# Altium PCB PCB1.PcbDoc
Units mm, origin at the board's own origin, x right, y up, seen from the top; angles counter-clockwise.
Board outline 48.77 x 52.07 mm, 2 copper layers (Top Layer, Bottom Layer); 24 components, 15 nets, 112 pads, 26 vias.
Unrouted connection lines stored in the file: 1.
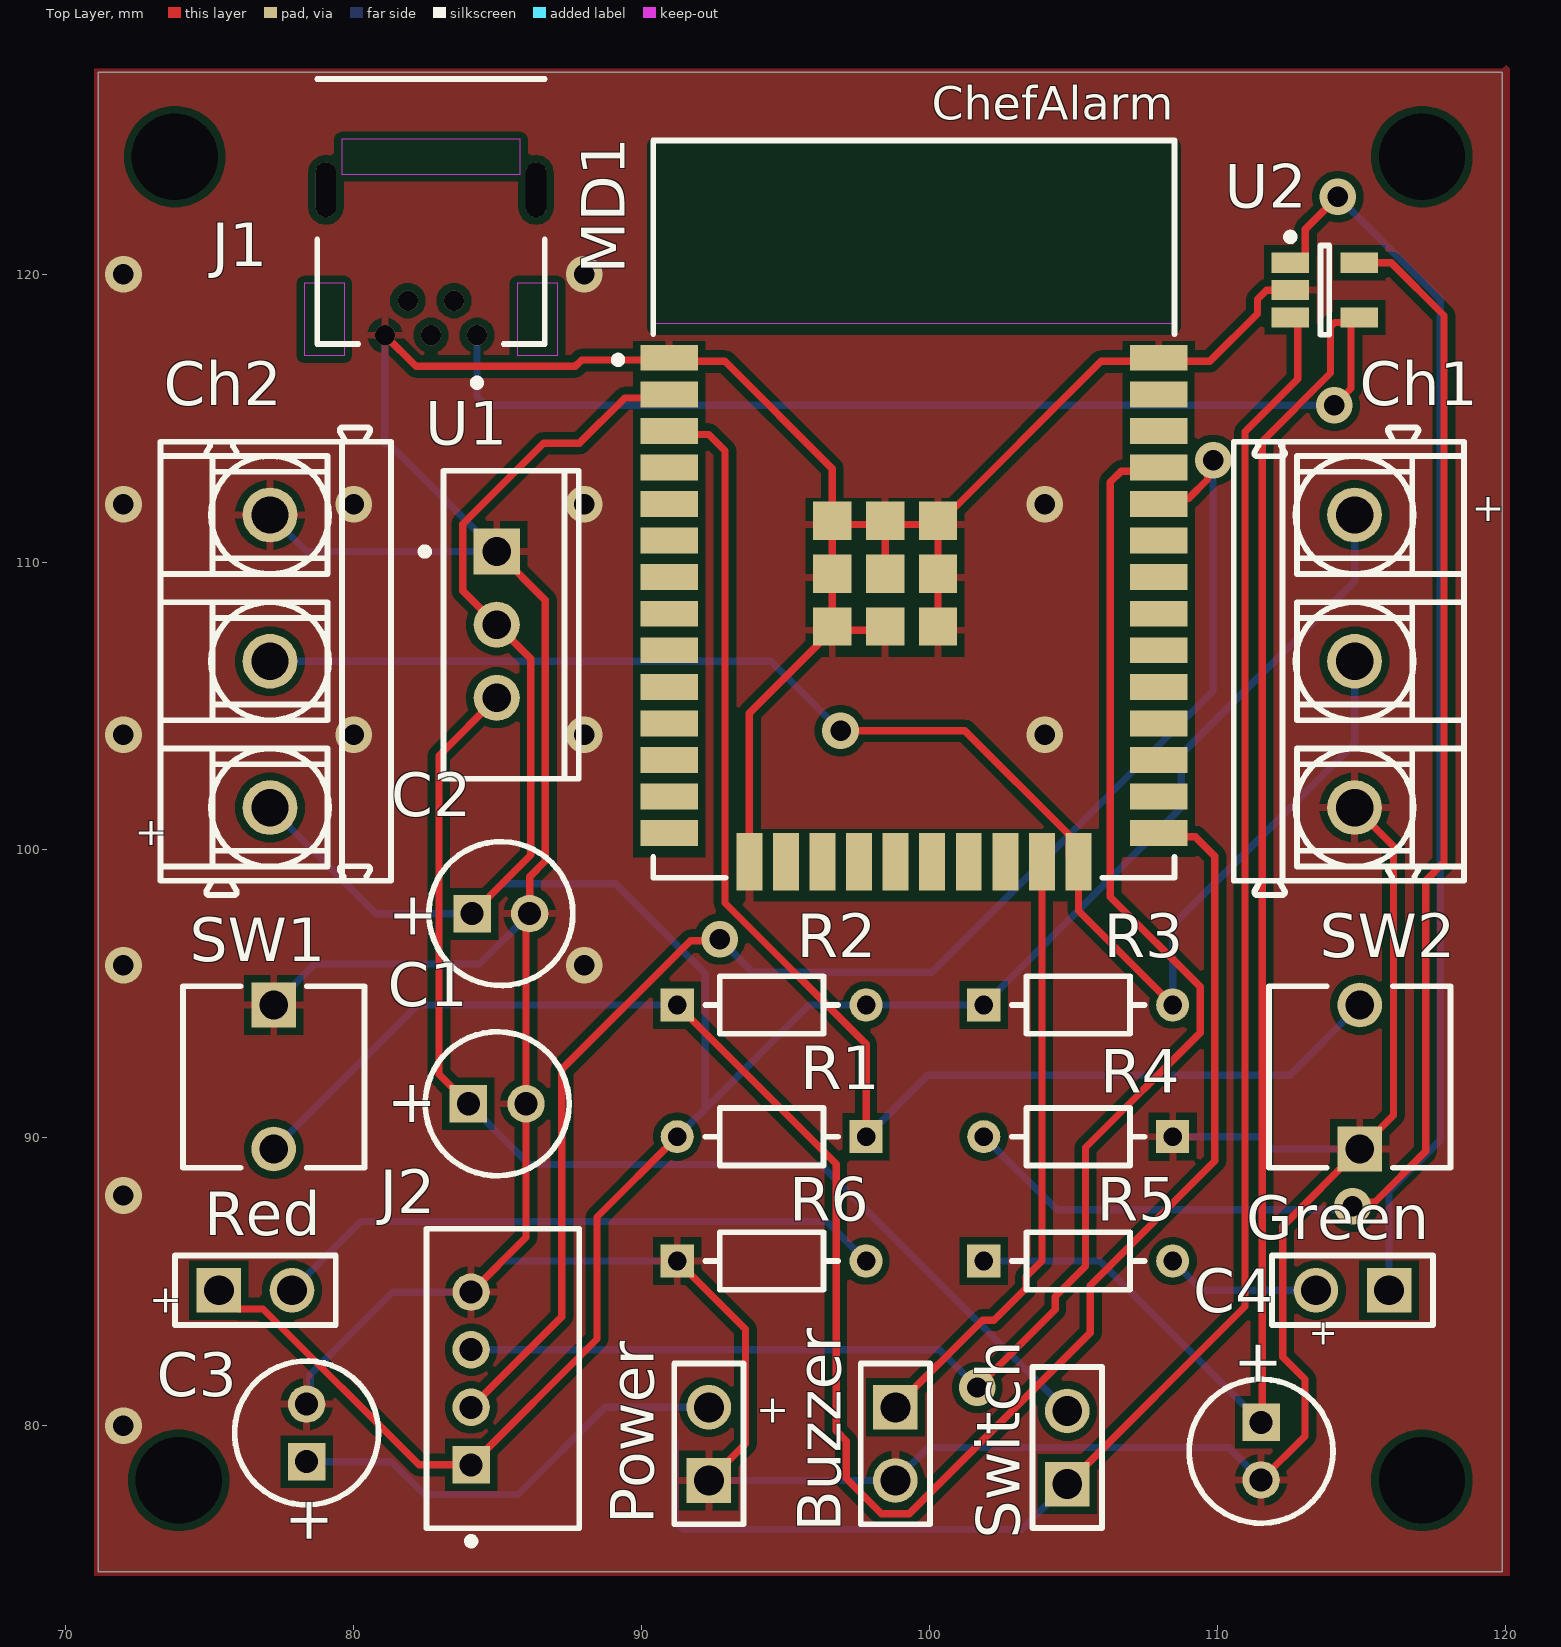
[diagram p0: Top Layer view]
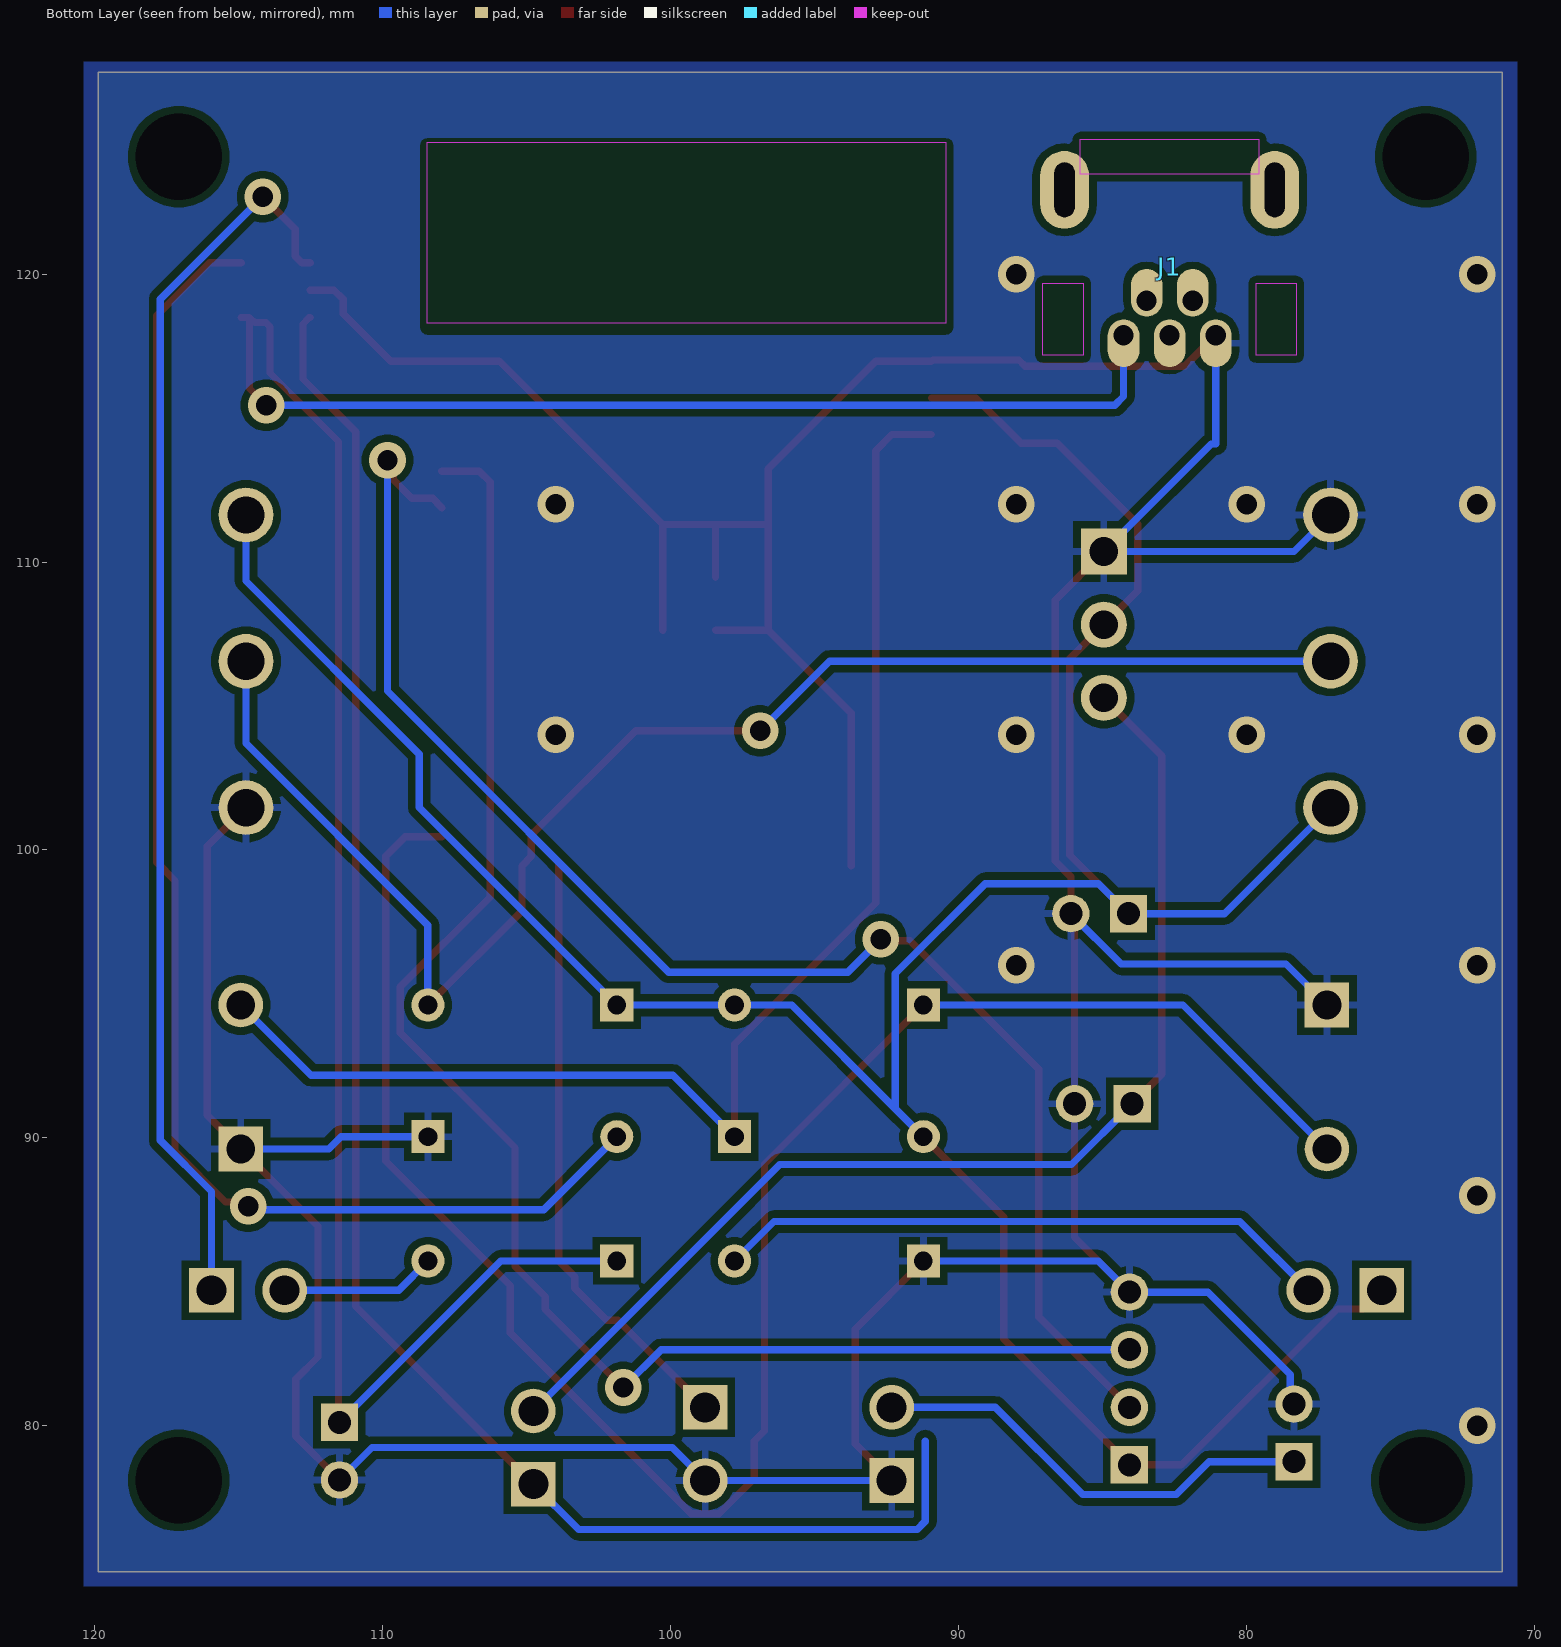
[diagram p1: Bottom Layer view, seen from below]
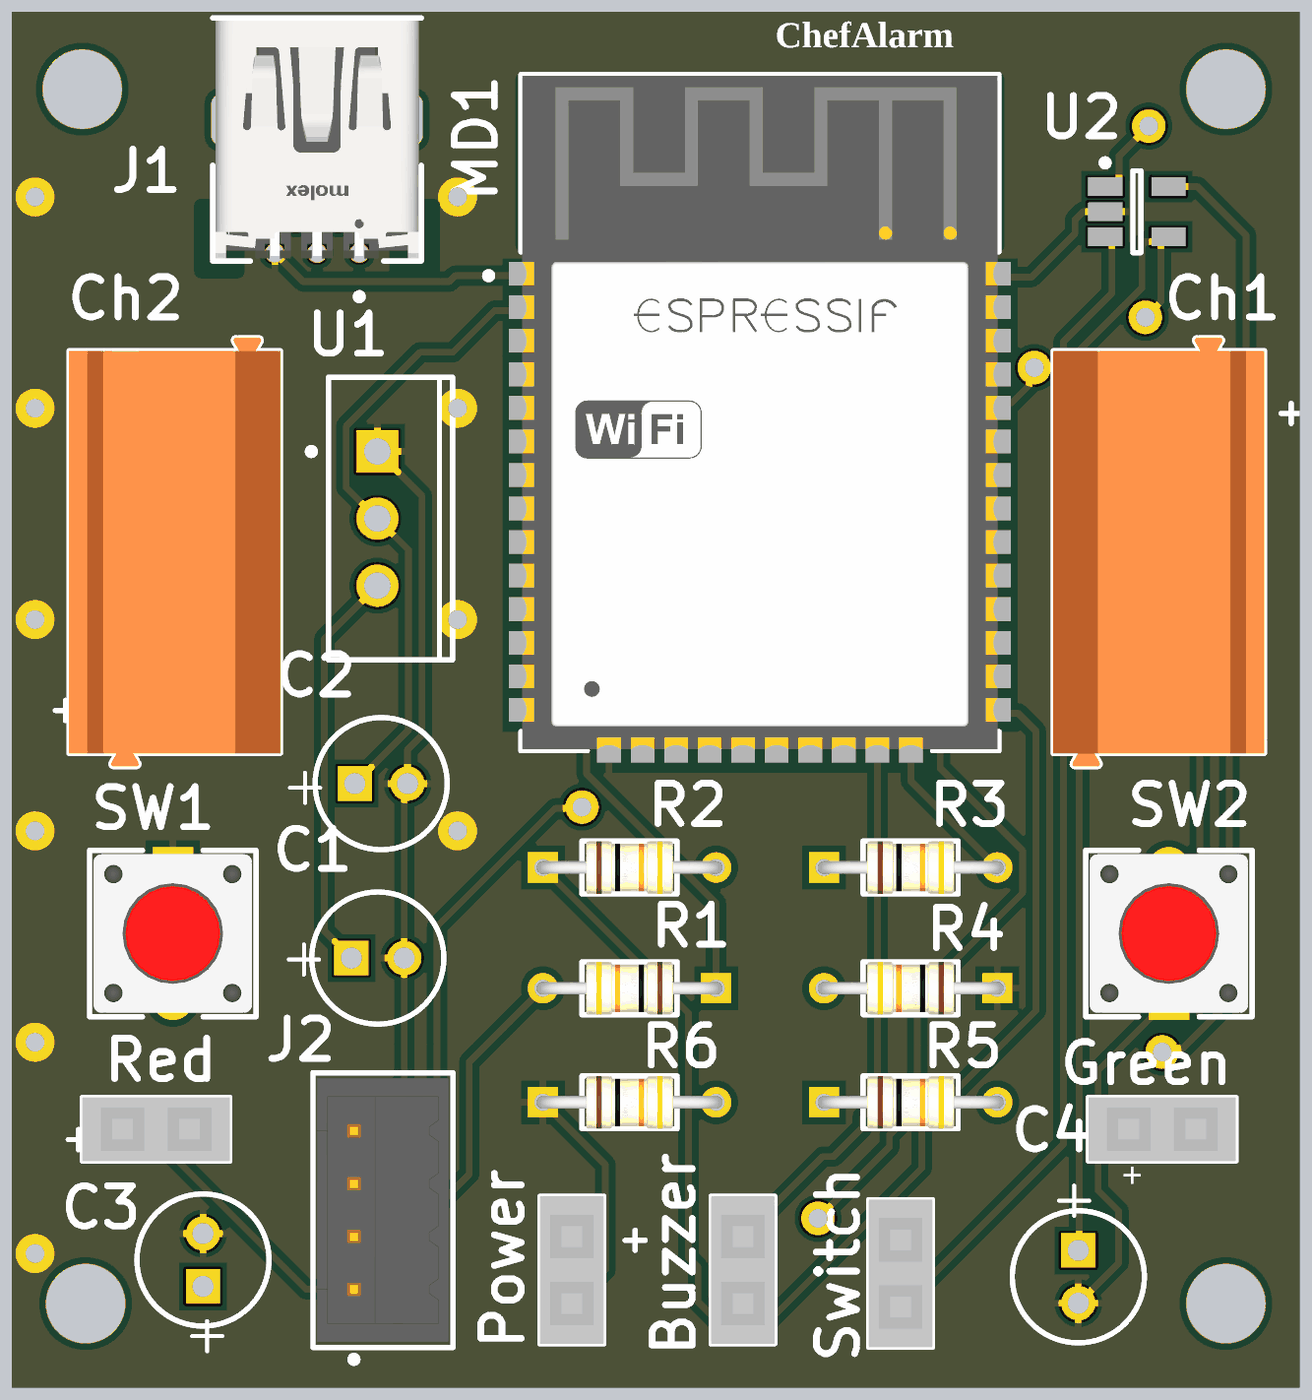
[diagram p2: 3D render of the assembled board from above, using the file's embedded part models]

## Layer stack, top to bottom
Top Solder: solder mask 0.0102, Solder Resist, Dk 3.5
Top Layer: signal copper 0.0356
Dielectric 1: dielectric 0.32, FR-4, Dk 4.8
Bottom Layer: signal copper 0.0356
Bottom Solder: solder mask 0.0102, Solder Resist, Dk 3.5

## Board outline
71.12,74.93 119.888,74.93 119.888,127 71.12,127

## Design rules (kind name [scope] priority, off if disabled: settings)
Clearance [All] p1: gap=0.254 ignorepadtopadclearanceinfootprint=FALSE except(0: Arc-Hole Track-Hole SMDPad-Hole THPad-Hole Via-Hole Fill-Hole Poly-Hole Region-Hole Text-Hole)
PolygonConnect [All] p1: connectstyle=Relief reliefconductorwidth=0.254 reliefentries=4 polygonreliefangle="90 Angle" airgapwidth=0.254
RoutingVias [All] p1: holewidth=0.711 width=1.27 viastyle="Through Hole" minholewidth=0.711 minwidth=1.27 maxholewidth=0.711 maxwidth=1.27
SolderMaskExpansion [All] p1: expansion=0.102 istentingtop=FALSE
Width [All] p1: maxlimit=0.254 minlimit=0.254 preferedwidth=0.254
30 further rules are at their usual default settings.

## Components (designator, comment, footprint, x,y, rotation, side; value= is the part's Value field where it differs from the comment)
Buzzer "SSW-102-02-T-S" SMTC-SSW-102-02-X-S 98.806,80.645 r270 top
C1 "ECA1HM100" CAPPR55-200-1100X500X1200 84.979,91.186 r0 top
C2 "ECA1HM100" CAPPR55-200-1100X500X1200 85.106,97.79 r0 top
C3 "4.7uF" CAPPR55-200-1100X500X1200 78.359,79.756 r90 top
C4 "4.7uF" CAPPR55-200-1100X500X1200 111.506,79.121 r270 top
Ch1 "1760500000" PM_5_08_90_03 114.554,106.553 r90 top
Ch2 "1760500000" PM_5_08_90_03 77.289,106.553 r270 top
Green "SSW-102-02-T-S" SMTC-SSW-102-02-X-S 115.951,84.709 r180 top
J1 "54819-0519" FP-54819-0519-MFG 82.677,122.174 r180 top
J2 "DF3-4P-2DSA(01)" FP-DF3-4P-2DSA_01-MFG 85.174,81.645 r270 top
MD1 "ESP32-WROOM-32D" FP-ESP32-WROOM-32D-MFG 99.45,111.834 r0 top
Power "SSW-102-02-T-S" SMTC-SSW-102-02-X-S 92.329,78.105 r90 top
R1 "10K" FP-CF18-MFG 94.51,90.043 r180 top value=10kΩ
R2 "10K" FP-CF18-MFG 94.51,94.615 r0 top value=10kΩ
R3 "4K7" FP-CF18-MFG 105.156,94.615 r0 top value=10kΩ
R4 "2K" FP-CF18-MFG 105.156,90.043 r180 top value=10kΩ
R5 "470Ohm" FP-CF18-MFG 105.156,85.725 r0 top value=10kΩ
R6 "220Ohm" FP-CF18-MFG 94.51,85.725 r0 top value=10kΩ
Red "SSW-102-02-T-S" SMTC-SSW-102-02-X-S 75.311,84.709 r0 top
SW1 "EVQ-21505R" FP-EVQ-21505R-MFG 77.216,92.115 r270 top
SW2 "EVQ-21505R" FP-EVQ-21505R-MFG 114.935,92.115 r90 top
Switch "SSW-102-02-T-S" SMTC-SSW-102-02-X-S 104.775,77.978 r90 top
U1 "LM1117T-5.0/NOPB" NDE0003A 84.963,107.823 r270 top
U2 "MCP73831T-3ACI/OT" SOT-23-OT5_M 113.722,119.441 r0 top

## Footprints (in the part's own frame and the unit in brackets; to place one, negate y for a bottom-side part, rotate by r counter-clockwise, add the part's x,y. Pads: shape width x height; smd on the part's side, far side on the other; paste and mask are expansions set on the pad)
CAPPR55-200-1100X500X1200 [mm] "THD, 2-Leads, Dia 5mm, Body Length 11mm"
  rect 1.3x1.3 hole 0.8: 1(-1,0)
  round 1.3 hole 0.8: 2(1,0)
  silkscreen extent -2.5,-2.5 2.5,2.5, body extent -2.5,-2.5 2.5,2.5, height 12
FP-54819-0519-MFG [mm]
  rrect100% 1.1x1.65 smd far side paste-1000 mask+0: 1(-1.6,4.575) 2(-0.8,2.825) 3(0,4.575) 4(0.8,2.825) 5(1.6,4.575)
  rrect100% 0.7x1.9 hole 1.9 slot 0.7 at 0 deg paste-1000 mask+0: 6(-3.65,-0.75) 7(3.65,-0.75)
  rrect100% 1.7x2.7 smd far side paste-1000 mask+0: 6(-3.65,-0.75) 7(3.65,-0.75)
  Keep-Out Layer region: 3,2.5 4.4,2.5 4.4,5 3,5
  Keep-Out Layer region: -4.4,2.5 -3,2.5 -3,5 -4.4,5
  Keep-Out Layer region: -3.1,-2.5 3.1,-2.5 3.1,-1.3 -3.1,-1.3
  silkscreen extent -3.95,-4.6 3.95,6.07, body extent -4.6,-4.7 4.6,5.5, height 0.25
FP-CF18-MFG [mm]
  rect 1.15x1.15 hole 0.65 paste-1000 mask+0: 1(-3.28,0)
  round 1.15 hole 0.65 paste-1000 mask+0: 2(3.28,0)
  silkscreen extent -2.3,-1 2.31,1, body extent -3.96,-1.1 3.96,1.1, height 0.25
FP-DF3-4P-2DSA_01-MFG [mm]
  rect 1.3x1.3 hole 0.8 paste-1000 mask+0: 1(3,-1.1)
  round 1.3 hole 0.8 paste-1000 mask+0: 2(1,-1.1) 3(-1,-1.1) 4(-3,-1.1)
  silkscreen extent -5.2,-2.65 5.77,2.65, body extent -5.3,-2.75 5.3,2.75, height 0.25
FP-ESP32-WROOM-32D-MFG [mm]
  rect 2x0.9 smd paste+0 mask+0: 1(-8.5,5.26) 2(-8.5,3.99) 3(-8.5,2.72) 4(-8.5,1.45) 5(-8.5,0.18) 6(-8.5,-1.09) 7(-8.5,-2.36) 8(-8.5,-3.63) 9(-8.5,-4.9) 10(-8.5,-6.17) 11(-8.5,-7.44) 12(-8.5,-8.71) 13(-8.5,-9.98) 14(-8.5,-11.25) 25(8.5,-11.25) 26(8.5,-9.98) 27(8.5,-8.71) 28(8.5,-7.44) 29(8.5,-6.17) 30(8.5,-4.9) 31(8.5,-3.63) 32(8.5,-2.36) 33(8.5,-1.09) 34(8.5,0.18) 35(8.5,1.45) 36(8.5,2.72) 37(8.5,3.99) 38(8.5,5.26)
  rect 0.9x2 smd paste+0 mask+0: 15(-5.715,-12.25) 16(-4.445,-12.25) 17(-3.175,-12.25) 18(-1.905,-12.25) 19(-0.635,-12.25) 20(0.635,-12.25) 21(1.905,-12.25) 22(3.175,-12.25) 23(4.445,-12.25) 24(5.715,-12.25)
  rect 1.33x1.33 smd paste+0 mask+0: 39(-2.835,-4.075) 39(-2.835,-2.24) 39(-2.835,-0.405) 39(-1,-4.075) 39(-1,-2.24) 39(-1,-0.405) 39(0.835,-4.075) 39(0.835,-2.24) 39(0.835,-0.405)
  Keep-Out Layer region: -9,6.45 9,6.45 9,12.75 -9,12.75
  Keep-Out Layer region: -9,6.45 9,6.45 9,12.75 -9,12.75
  silkscreen extent -10.4,-12.8 9.05,12.8, body extent -9.6,-13.35 9.6,12.9, height 0.25
FP-EVQ-21505R-MFG [mm]
  rect 1.55x1.55 hole 1 paste-1000 mask+0: A(-2.5,0)
  round 1.55 hole 1 paste-1000 mask+0: B(2.5,0)
  silkscreen extent -3.15,-3.15 3.15,3.15, body extent -3.37,-3.25 3.37,3.25, height 0.25
NDE0003A [mm] "FM, 3-Leads, Body 10.7x4.7mm, Pitch 2.54mm"
  rect 1.6x1.6 hole 1: 1(-2.54,0)
  round 1.6 hole 1: 2(0,0) 3(2.54,0)
  silkscreen extent -5.35,-2.62 5.35,2.85, body extent -5.4,-1.9 5.4,2.9, height 19.4
PM_5_08_90_03 [mm] "PM 5.08/03/90 3.5"
  round 1.9 hole 1.3: A1(-5.08,-0.2) A2(0,-0.2) A3(5.08,-0.2)
  silkscreen extent -8.12,-4 8.12,4, body extent -8.12,-4 8.12,4, height 10.01
SMTC-SSW-102-02-X-S [mm] "SQ Post Socket, 1x2 Pins, Vertical, 2.54mm Pitch, Female"
  rect 1.55x1.55 hole 1.04: 1(0,0)
  round 1.55 hole 1.04: 2(2.54,0)
  silkscreen extent -1.53,-1.2 4.07,1.2, body extent -1.52,-1.21 4.06,1.21, height 8.51
SOT-23-OT5_M [mm] "SOT23, 5-Leads, Body 2.9x1.7mm, Pitch 0.95mm, Lead Span 2.8mm, IPC Low Density"
  rect 1.3x0.7 smd: 1(-1.2,0.95) 2(-1.2,0) 3(-1.2,-0.95) 4(1.2,-0.95) 5(1.2,0.95)
  silkscreen extent -1.32,-1.55 0.15,1.97, body extent -0.9,-1.55 0.9,1.55, height 1.45

## Part data
Buzzer Green Power Red Switch: library part CMP-1023-00323-1, "SQ Post Socket, Through-hole, Vertical, -55 to 105 degC, 2.54 mm Pitch, 2-Pin, Female, RoHS", Manufacturer=Samtec, Temperature Range="-55 to 105 degC", ComponentLink1Description="Manufacturer URL", ComponentLink1URL=http://www.samtec.com, ComponentLink2Description=Datasheet, ComponentLink2URL=http://www.samtec.com/documents/webfiles/pdf/SSW_TH.PDF, ComponentLink3Description="Package Specification", ComponentLink3URL=http://www.samtec.com/documents/webfiles/cpdf/SSW-1XX-XX-XXX-X-XX-XXX-XX-MKT.pdf, DatasheetVersion=F-214, Mounting Technology=Through-hole, Orientation=Vertical, PackageDescription="Assembly, Socket Strip .016 X .031 Tail", PackageReference=SSW-102-02-X-S, PackageVersion="CA, 6/1987", PartNumber=SSW-102-02-T-S, Pitch="2.54 mm", RoHS=True
C1 C2: library part CMP-1665-00038-2, "Aluminum Electrolytic Capacitor, 10 uF, +/- 20%, 50 V, -40 to 85 degC, 2-Pin THD, RoHS, Bulk", Capacitance=10uF, Case/Package=Radial, Dielectric Material=Aluminium, Leakage Current=3uA, Manufacturer=Panasonic, Max Operating Temperature=85degC, Min Operating Temperature=-40degC, Package Description="2-Pin Radial Lead, Dia 5 mm, Height 12 mm", Package Quantity=200, Package Reference=CAPPR55-200-1100X500X1200, Ripple Current=65mA, Tolerance=20%, Voltage=50V, Datasheet URL=https://industrial.panasonic.com/cdbs/www-data/pdf/RDF0000/ABA0000C1218.pdf, Datasheet Version="Rev. 05, 10/2016", Diameter=5mm, Dissipation Factor=0.12%, Height=11mm, Height - Seated (Max)=0.472inch, Lead Diameter=0.5mm, Lead Free=LeadFree, Lead Pitch=2mm, Lead/Base Style=Straight, Length=11mm, Life (Hours)=2000Hour, Manufacturer URL=http://www.panasonic.com/, Mount=ThroughHole, Number of Pins=2, Packaging=Bulk, Radiation Hardening=No, REACH SVHC=NoSVHC, Ripple Current (AC)=65mA, RoHSCompliant=true, Termination=Radial, Voltage Rating=50V, Voltage Rating (DC)=50V
C3 C4: library part CMP-1665-00037-2, "Aluminum Electrolytic Capacitor, 4.7 uF, +/- 20%, 50 V, -40 to 85 degC, 2-Pin THD, RoHS, Bulk", Case/Package=Radial, Dielectric Material=Aluminium, Leakage Current=3uA, Manufacturer=Panasonic, Max Operating Temperature=85degC, Min Operating Temperature=-40degC, Package Description="2-Pin Radial Lead, Dia 5 mm, Height 12 mm", Package Quantity=200, Package Reference=CAPPR55-200-1100X500X1200, Ripple Current=45mA, Tolerance=20%, Voltage=50V, Capacitance=4.7uF, Datasheet URL=https://industrial.panasonic.com/cdbs/www-data/pdf/RDF0000/ABA0000C1218.pdf, Datasheet Version="Rev. 05, 10/2016", Diameter=5mm, Dissipation Factor=0.12%, Height=11mm, Height - Seated (Max)=0.472inch, Lead Diameter=0.5mm, Lead Free=LeadFree, Lead Pitch=2mm, Lead/Base Style=Straight, Length=11mm, Life (Hours)=2000Hour, Manufacturer URL=http://www.panasonic.com/, Mount=ThroughHole, Number of Pins=2, Packaging=Bulk, Radiation Hardening=No, REACH SVHC=NoSVHC, Ripple Current (AC)=45mA, RoHSCompliant=true, Termination=Radial, Voltage Rating=50V, Voltage Rating (DC)=50V, Width=0inch
Ch1 Ch2: library part CMP-1559-01629-1, "OMNIMATE Signal - series PM", Colour=Orange, Manufacturer=Weidmueller, Rated_current_use_group_B_UL_1059="15 A", Rated_voltage_for_surge_voltage_class_pollution_degree_II_2="600 V", Rated_voltage_use_group_B_UL_1059="300 V", UL_94_flammability_rating=V-0, ComponentLink1Description="Manufacturer URL", ComponentLink1URL=http://www.weidmueller.com/, ComponentLink2Description="URL Link1", ComponentLink2URL=http://catalog.weidmueller.com/catalog/Start.do?localeId=en&ObjectID=1760500000, Contact_material=Cu-Leg, Contact_surface=tinned, Insulating_material="Wemid (PA)", Mounting_onto_the_PCB="Solder connection", No_of_poles=3, PackageReference=PM_5_08_90_03, Packaging=Box, PartNumber=1760500000, Pitch_inch="0,2 inch", Pitch_mm="5,08 mm", Qty="500 PCS", Revision=V1, Short_text_for_material="PM 5.08/03/90 3.5SN OR BX", Side_termination_characteristic="closed side", Solder_pin_length_mm="3,5 mm", Solid_max_H05_07_V_U="2,5 mm²", Solid_min_H05_07_V_U="0,13 mm²", Wire_cross_section_AWG_max_UL_1059="AWG 14", Wire_cross_section_AWG_min_UL_1059="AWG 26"
J1: library part CMP-04767-000009-1, "CONN RCPT USB2.0 MINI B 5P R/A", Color=Black, Contact Resistance=50mR, Current Rating=1A, Flammability Rating="UL94 V-0", Insulation Resistance=100MR, Max Operating Temperature=50°C, Min Operating Temperature=0°C, Package Quantity=3600, Voltage Rating=30V, Connector Type=USB, Contact Material="Copper Alloy", Contact Plating=Gold, Data Rate=480Mbps, Depth=9mm, Features=Shielded, Gender=Receptacle, Housing Color=Black, Housing Material=Polyamide, Lead Free="Lead Free", Length=7.7mm, Max Current Rating=1A, Mount="Through Hole", Number of Circuits=5, Number of Contacts=5, Number of Ports=1, Number of Positions=5, Number of Rows=1, Number of Terminals/Pins=5, Orientation="Right Angle", Packaging=Tray, Pitch=0.8mm, Radiation Hardening=No, Series=54819, Termination=Solder, USB Standard="USB 2.0", Voltage Rating (DC)=30V, Width=6.9mm, Working Voltage=30V
J2: library part CMP-11610-000023-1, "CONN HEADER VERT 4POS 2MM", Color=Black, Contact Resistance=30mR, Current Rating=3A, Max Operating Temperature=85°C, Max Voltage Rating (AC)=100V, Min Operating Temperature=-30°C, Package Quantity=100, Connector Type="Male Pin", Contact Gender=Male, Contact Material=Brass, Contact Plating=Gold, Contact Type="Male Pin", Depth=5mm, Gender=Male, Height=5mm, Housing Color=Black, Housing Material=Polyamide, Lead Free="Lead Free", Length=10mm, Max Current Rating=3A, Mount="Through Hole", Number of Contacts=4, Number of Positions=4, Number of Rows=1, Orientation=Straight, Packaging=Bag, Pitch=2mm, REACH SVHC="No SVHC", RoHS Compliant=Yes, Series=DF3, Termination=Press-Fit, Voltage Rating=100V
MD1: library part CMP-194065-000003-1, "WIFI MODULE 32MBITS SPI FLASH", Manufacturer="Espressif Systems", Max Frequency=2484MHz, Max Supply Voltage=3.6V, Min Supply Voltage=3V, Nominal Supply Current=500mA, Temperature="-40°C to +85°C", Temperature Range High=+85°C, Temperature Range Low=-40°C, Automotive=No, Bandwidth=72MHz, Category=UNK, ComponentLink2Description=Datasheet, ComponentLink2URL=https://www.espressif.com/sites/default/files/documentation/esp32-wroom-32d_esp32-wroom-32u_datasheet_en.pdf, Data Rate=150Mbits/s, Device Class L1="Integrated Circuits (ICs)", Device Class L2="RF Semiconductors and Devices", Device Class L3=Transceivers, Digikey Description="WIFI MODULE 32MBITS SPI FLASH", Height=3.2mm, Interface=I2C,SPI,UART,Ethernet,I2S,Other, Lead Free=Yes, Manufacturer Part Number=ESP32-WROOM-32D, Mouser Description="Wi-Fi/BT BLE Module ESP32-D0WD, SPI Flash, UART, P", Number Of Adc Channels=16, Number Of Gpio=32, Octopart=https://octopart.com/esp32-wroom-32d-espressif+systems-91040050, Package=ESP32-WROOM-32D, RoHS=TRUE, Sensitivity=-98dBm
R1 R2 R3 R4 R5 R6: library part CMP-26528-000002-1, "RES 10K OHM 1/8W 5% CF AXIAL", Manufacturer="Stackpole Electronics", Manufacturer Part Number=CF18JT10K0, Package=CF18, Power Rating=0.125W, Resistance=10kΩ, Temperature="-55°C to +155°C", Temperature Coefficient=0-500ppm/°C, Temperature Range High=+155°C, Temperature Range Low=-55°C, Tolerance=5%, Voltage Rating=250V, Automotive=No, Category=Res, ComponentLink2Description=Datasheet, ComponentLink2URL=http://www.seielect.com/Catalog/SEI-CF_CFM.pdf, Composition="Carbon Film", Device Class L1="Passive Components", Device Class L2=Resistors, Device Class L3="Through-Hole Resistors", Digikey Description="RES 10K OHM 1/8W 5% CF AXIAL", Height=2mm, Ipc Land Pattern Name=RESAD656W65L360D200, Lead Free=Yes, Octopart=https://octopart.com/cf18jt10k0-stackpole+electronics-19205642, RoHS=TRUE, Series=CF
SW1 SW2: library part CMP-05618-000118-1, "SWITCH TACTILE SPST-NO 0.02A 15V", Actuator Color=Red, Case/Package=Radial, Contact Current Rating=20mA, Contact Resistance=50mR, Max Operating Temperature=70°C, Max Voltage Rating (DC)=15V, Min Operating Temperature=-20°C, Operating Force=1.6N, Package Quantity=1, Actuator Length=1.6mm, Actuator Type=Standard, Contact Plating=Silver, Current Rating=20mA, Depth=6mm, Electrical Life=100000Cycles, Height=5mm, Illumination Type=Non-Illuminated, Lead Free="Lead Free", Length=6mm, Max Current Rating=20mA, Mechanical Life=100000Cycles, Mount="Through Hole", Orientation=Straight, Packaging="Tape and Reel", Series=EVQ2, Size=6mm, Switch Function=Off-Mom, Switch Travel=0.25mm, Termination="PC Pin", Throw Configuration=SPST, Voltage Rating (DC)=15V, Width=6mm
U1: library part CMP-0062-02493-3, "800mA Low-Dropout Linear Regulator, 3-pin TO-220, Pb-Free", Manufacturer="Texas Instruments", PackageTopMarking=NSUZXYTTE#*LM1117T*5.0, PowerWise=N, ComponentLink1Description="Datasheet URL", ComponentLink1URL=http://www.ti.com/general/docs/lit/getliterature.tsp?genericPartNumber=LM1117-N&fileType=pdf, CompType="LDO IC", PackageDescription="TO-220, Molded, 3 Lead, Straight", PackageReference=NDE0003A, PinCount=3, RoHS=Y
U2: library part CMP-0133-00145-1, "Miniature Single-Cell, Fully Integrated Li-Ion, Li-Polymer Charge Management Controller, 4.35V, 5-Pin SOT-23, Industrial Temperature, Tape and Reel", Code_IPC=SOT23-5, DatasheetVersion="revE, Sep-2008", PackageDescription="5-Lead Plastic Small Outline Transistor (OT) [SOT-23]", PackageReference=SOT-23-OT5, PackageVersion="revBB, Aug-2009"

## Free pads (board coordinates)
  round 1.524 hole 3: 2(117.094,124.079) 3(117.094,78.105) 4(73.787,124.079) 5(73.914,78.105)

## Via types
v1: diameter 1.27, hole 0.711, Top Layer to Bottom Layer, 21 vias
v2: diameter 0.7, hole 0.7, Top Layer to Bottom Layer, 5 vias

## Nets (pads, with @x,y where several pads share a name; then routed paths per layer and width w, separated by ;. In a path a pad name is that pad's centre, name@x,y a point inside that pad or via, vN(x,y) a via of type N, cw(c..) or ccw(c..) an arc to the next point about the centre after c; other vN are vias at no path point)
3.3V: C2.1 Ch1.A3 Ch2.A3 J2.1 MD1.2 R1.2 R2.2 R3.1 Red.1 U1.2 | length 107.9
  Top Layer w0.254: Red.1 75.959,84.061 76.848,84.061 82.264,78.645 J2.1 88.443,83.014 88.443,87.256 R1.2 ; C2.1 86.144,99.828 86.144,106.642 83.782,109.004 83.782,111.321 86.583,114.122 87.833,114.122 89.408,115.697 MD1.2@90.95,115.697
  Bottom Layer w0.254: Ch2.A3 80.772,97.79 C2.1 85.147,98.831 89.078,98.831 92.202,95.707 92.202,91.015 ; R1.2 92.202,91.015 ; Ch1.A3 114.754,109.34 108.734,103.32 108.734,101.473 R3.1 R2.2 95.802,94.615 92.202,91.015
EN: MD1.3 R1.1 SW2.B | length 47.1
  Top Layer w0.254: MD1.3@90.95,114.427 92.329,114.427 92.888,113.868 92.888,98.16 97.79,93.258 R1.1
  Bottom Layer w0.254: R1.1 99.924,92.177 112.497,92.177 SW2.B
GND: Buzzer.2 C1.2 C2.2 C3.2 C4.2 Ch1.A1 Ch2.A1 J1.5 J2.4 MD1.1 MD1.15 MD1.38 MD1.39 Power.1 R4.1 R6.1 SW1.A SW2.A U1.1 U2.2 | length 192.7
  Top Layer w0.254: v2(81.077,117.874) 82.158,116.793 87.686,116.793 87.91,117.016 90.901,117.016 90.95,116.967 92.888,116.967 96.615,113.24 MD1.39@96.615,111.302 ; J2.4 85.979,86.55 C1.2 85.979,97.663 C2.2 86.106,99.072 86.652,99.618 86.652,108.674 U1.1 ; R6.1 93.599,83.356 93.599,79.375 Power.1 ; MD1.15@93.735,99.457 93.735,104.752 MD1.39@96.615,107.632 ; MD1.39@98.45,107.632 MD1.39@96.615,107.632 ; MD1.39@98.45,109.467 MD1.39@98.45,111.302 ; MD1.39@100.285,107.632 100.285,109.467 MD1.39@100.285,111.302 ; C4.2 113.03,79.645 113.03,81.617 112.255,82.392 112.255,86.935 SW2.A 116.103,90.783 116.103,100.124 Ch1.A1 ; U2.2 111.694,119.441 111.379,119.126 111.379,118.618 109.728,116.967 107.95,116.967 105.95,116.967 MD1.39@100.285,111.302 ; MD1.39@96.615,107.632 96.615,109.467 MD1.39@96.615,111.302 ; MD1.39@96.615,111.302 MD1.39@98.45,111.302 ; MD1.39@98.45,111.302 MD1.39@100.285,111.302
  Bottom Layer w0.254: Ch2.A1 78.359,110.363 U1.1 81.229,114.097 81.077,114.097 J1.5 v2(81.077,117.874) ; SW1.A 78.638,96.037 84.353,96.037 C2.2 ; C3.2 78.485,80.882 78.485,81.787 81.343,84.645 J2.4 85.154,85.725 R6.1 ; Power.1 Buzzer.2 99.949,79.248 110.379,79.248 C4.2 ; R4.1 111.455,90.043 111.883,89.615 SW2.A
  other v1: 72,80 72,88 72,96 88,96 72,104 80,104 88,104 104,104 72,112 80,112 88,112 104,112 72,120 88,120
IO0: MD1.25 R2.1 SW1.B | length 67.1
  Top Layer w0.254: R2.1 96.749,89.096 96.749,79.832 97.104,79.477 97.104,78.172 98.327,76.949 99.292,76.949 105.577,83.234 105.577,84.876 109.9,89.199 109.9,99.777 109.22,100.457 MD1.25@107.95,100.457
  Bottom Layer w0.254: SW1.B 82.216,94.615 R2.1
NetBuzzer_1: Buzzer.1 MD1.23 | length 21.2
  Top Layer w0.254: Buzzer.1 101.831,83.67 102.229,83.67 103.34,84.782 103.34,85.179 103.895,85.734 MD1.23@103.895,99.457
NetC1_1: C1.1 Switch.2 U1.3 | length 40.6
  Top Layer w0.254: C1.1 82.956,92.209 82.956,103.276 U1.3
  Bottom Layer w0.254: C1.1 86.087,89.078 96.215,89.078 Switch.2
NetC4_1: C4.1 J1.1 R5.1 U2.4 | length 87.5
  Top Layer w0.254: C4.1@111.252,80.375 C4.1 111.542,80.157 111.542,114.183 113.919,116.561 113.919,118.166 114.068,118.314 114.454,118.314 U2.4@114.63,118.491 ; v1(114.046,115.443) 114.63,116.027 U2.4@114.63,118.491 ; U2.4 U2.4@114.63,118.491
  Bottom Layer w0.254: J1.1 84.277,115.748 84.582,115.443 v1(114.046,115.443) ; R5.1 105.902,85.725 C4.1
  other v2: 84.277,117.874
NetCh1_A2: Ch1.A2 Ch2.A2 MD1.24 R3.2 | length 52.2
  Top Layer w0.254: v1(96.901,104.14) 101.219,104.14 104.842,100.517 104.842,99.78 105.165,99.457 105.165,97.886 R3.2
  Bottom Layer w0.254: Ch2.A2 94.488,106.553 v1(96.901,104.14) ; R3.2 108.436,97.387 114.754,103.705 Ch1.A2
NetGreen_1: Green.1 U2.1 | length 43.3
  Top Layer w0.254: U2.1 112.822,120.391 113.045,120.614 113.045,121.554 v1(114.173,122.682)
  Bottom Layer w0.254: v1(114.173,122.682) 117.729,119.126 117.729,89.916 115.951,88.138 Green.1
NetGreen_2: Green.2 R5.2 | length 5.4
  Bottom Layer w0.254: R5.2 109.452,84.709 Green.2
NetR4_2: R4.2 U2.5 | length 50.2
  Top Layer w0.254: v1(114.681,87.63) 114.828,87.777 115.463,87.777 117.221,89.535 117.221,98.933 117.856,99.568 117.856,118.557 116.022,120.391 U2.5
  Bottom Layer w0.254: R4.2 104.416,87.503 114.554,87.503 v1(114.681,87.63)
NetR6_2: R6.2 Red.2 | length 21.5
  Bottom Layer w0.254: Red.2 80.239,87.097 96.418,87.097 R6.2
RX: J2.3 MD1.35 | length 55.9
  Top Layer w0.254: v1(101.649,81.333) 104.356,84.04 104.356,84.493 105.41,85.547 105.41,89.668 109.392,93.65 109.392,95.25 106.274,98.368 106.274,112.776 106.655,113.157 MD1.35@107.95,113.157
  Bottom Layer w0.254: J2.3 100.337,82.645 v1(101.649,81.333)
TX: J2.2 MD1.34 | length 52.9
  Top Layer w0.254: J2.2 87.224,83.795 87.224,92.38 91.694,96.85 92.659,96.85 v1(92.71,96.901) ; MD1.34@107.95,111.887 108.273,112.21 108.992,112.21 109.645,112.863 109.645,113.344 v1(109.839,113.538)
  Bottom Layer w0.254: v1(92.71,96.901) 93.853,95.758 100.076,95.758 109.839,105.521 v1(109.839,113.538)
Vcc: C3.1 Power.2 Switch.1 U2.3 | length 76.8
  Top Layer w0.254: Switch.1 110.945,84.148 110.945,114.527 112.776,116.357 112.776,118.268 112.553,118.491 U2.3
  Bottom Layer w0.254: C3.1 81.311,78.756 82.453,77.614 85.7,77.614 88.731,80.645 Power.2 ; 91.161,79.477 91.161,76.683 91.44,76.403 103.2,76.403 Switch.1
pads on no net: J1.2 J1.3 J1.4 J1.6 J1.7 MD1.4 MD1.5 MD1.6 MD1.7 MD1.8 MD1.9 MD1.10 MD1.11 MD1.12 MD1.13 MD1.14 MD1.16 MD1.17 MD1.18 MD1.19 MD1.20 MD1.21 MD1.22 MD1.26 MD1.27 MD1.28 MD1.29 MD1.30 MD1.31 MD1.32 MD1.33 MD1.36 MD1.37
copper on no net:
  other v2: 82.677,117.874 81.877,119.074 83.477,119.074

## Polygon pours and split planes (outlines as drawn)
GND on Top Layer "GND_L01_P000" (solid, pour order 0): 70.993,127.127 119.888,127.127 120.015,127.254 120.142,127.127 120.142,74.803 70.993,74.803
GND on Bottom Layer "GND_L02_P001" (solid, pour order 1): 70.612,127.381 120.396,127.381 120.396,74.422 70.612,74.422

## Silkscreen, mask and mechanical layers (free items; w line width, h text height)
Top Overlay:
  text "ChefAlarm" at 100.076,124.968 h2
  text "+" at 118.818,111.412 h1
  text "+" at 72.399,100.17 h1
  text "+" at 72.89,83.922 h1
  text "+" at 113.157,82.519 h1.52
  text "+" at 93.972,80.112 h1

## Text inside footprints (layer, text, board x,y; h text height)
C1: Top Overlay "+" at 81.153,90.551 h1.5
C2: Top Overlay "+" at 81.198,97.053 h1.5
C3: Top Overlay "+" at 79.096,75.848 h1.5 r90
C4: Top Overlay "+" at 110.769,83.029 h1.5 r270